# Altium PCB A39C-T400A22D1a.pcbdoc
Units mm, origin at the board's own origin, x right, y up, seen from the top; angles counter-clockwise.
Board outline 74.15 x 49.73 mm, 2 copper layers (Top Layer, Bottom Layer); 2 components, 7 nets, 10 pads, 0 vias.
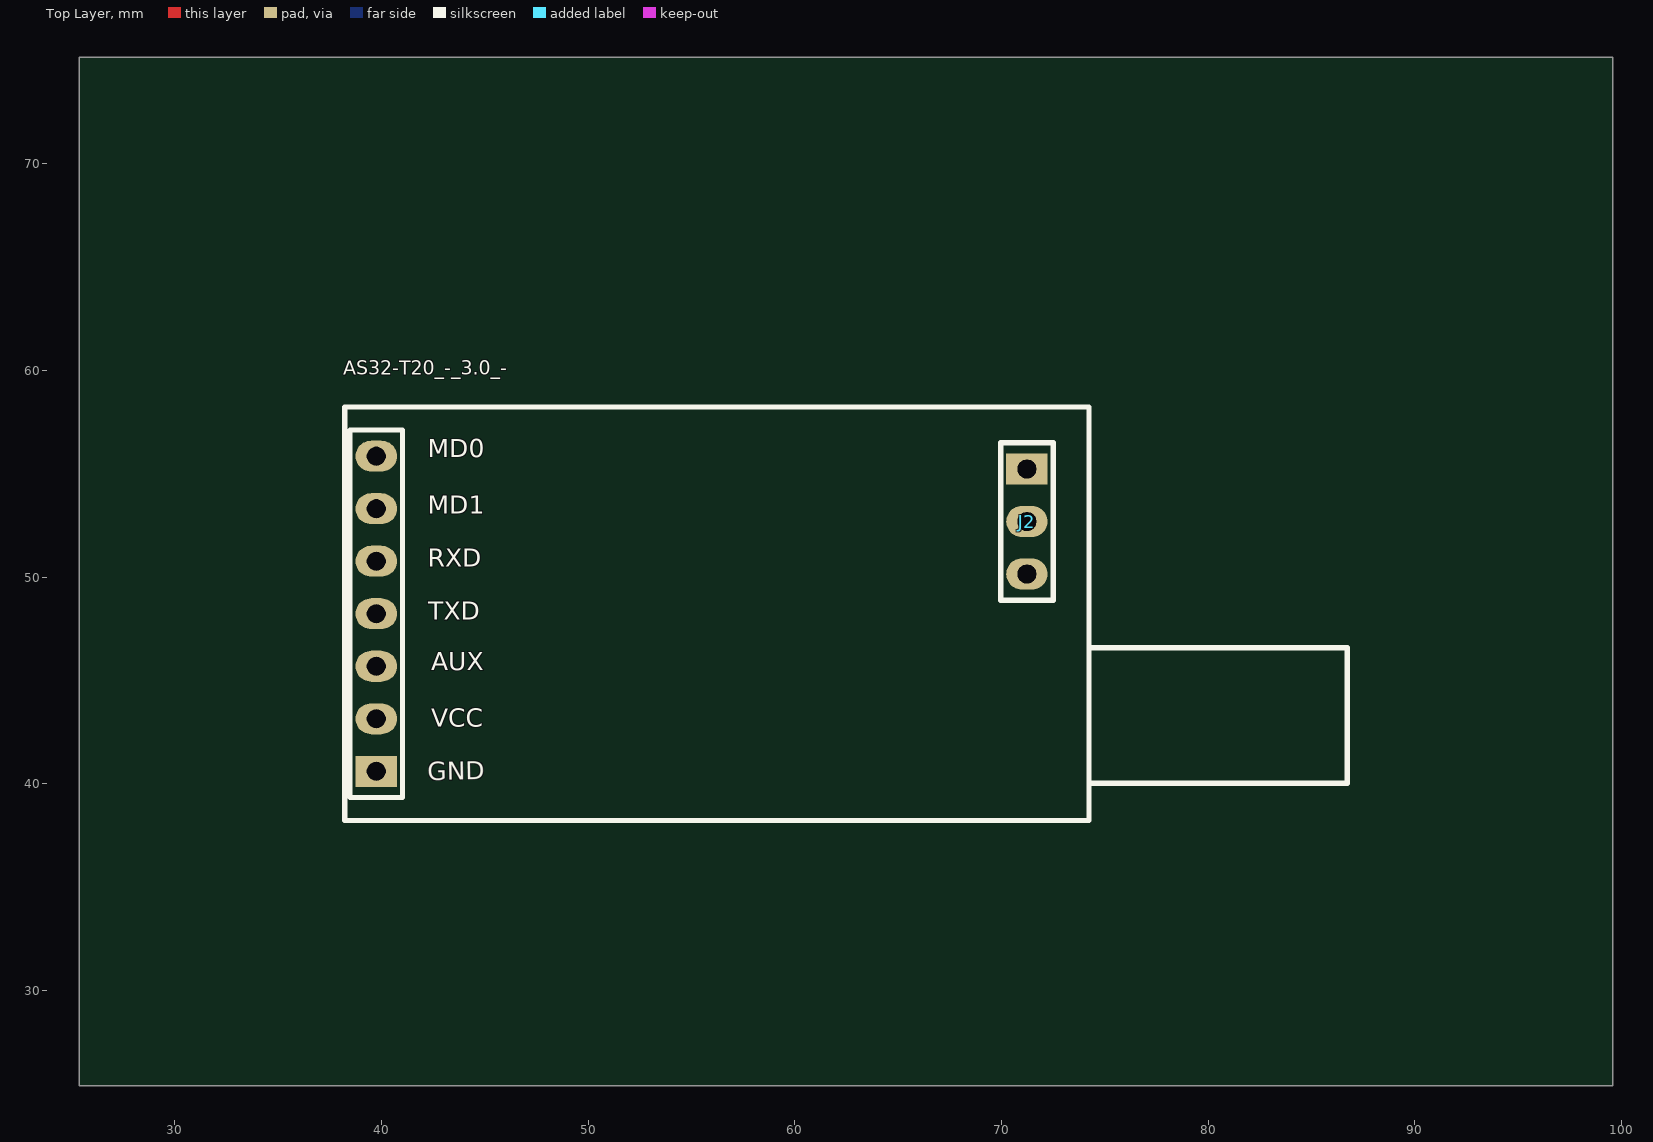
[diagram p0: Top Layer view]
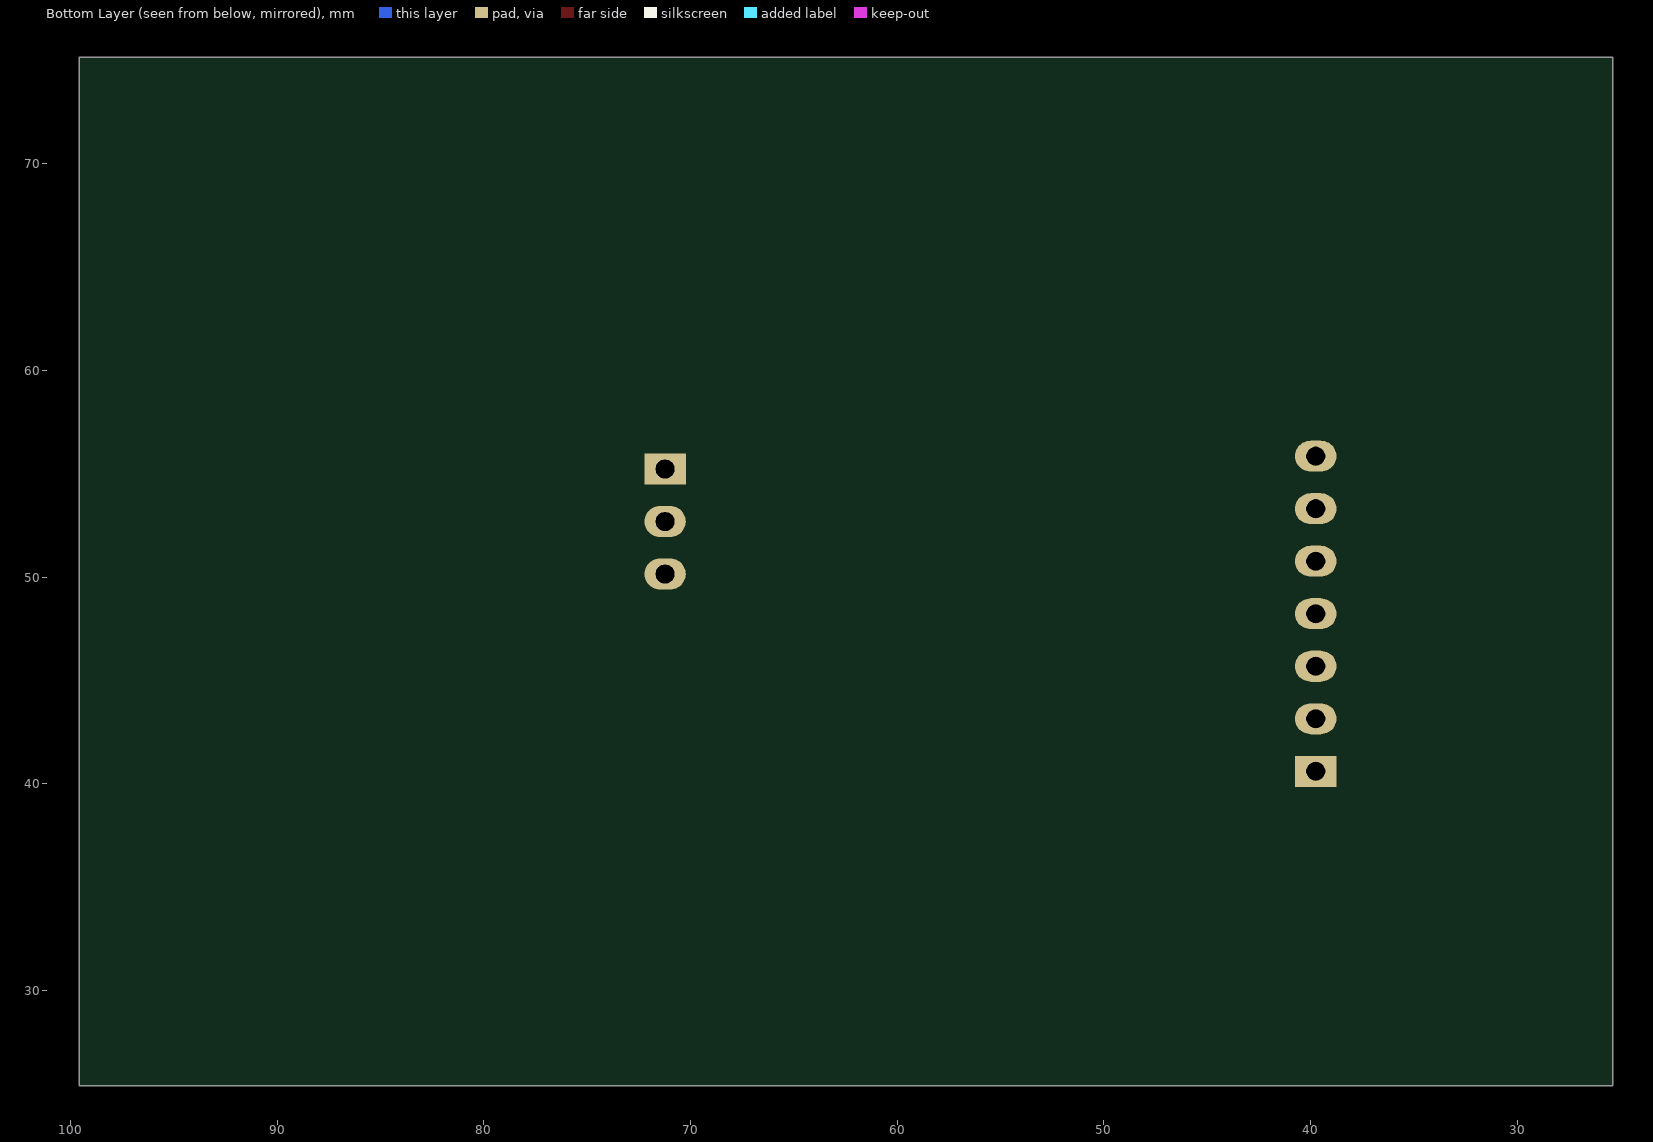
[diagram p1: Bottom Layer view, seen from below]

## Layer stack, top to bottom
Top Layer: signal copper (thickness not stored)
Dielectric: dielectric 0.32, FR-4, Dk 4.8
Bottom Layer: signal copper (thickness not stored)

## Board outline
99.554,25.4 25.4,25.4 25.4,75.133 99.554,75.133

## Components (designator, comment, footprint, x,y, rotation, side; value= is the part's Value field where it differs from the comment)
AS32-T20_-_3.0_- "HEADER1X7-2.54MM" HEADER1X7-2.54MM 39.755,40.607 r0 top
J2 "HEADER1X3-2.54MM" HEADER1X3-2.54MM 71.227,55.227 r180 top

## Footprints (in the part's own frame and the unit in brackets; to place one, negate y for a bottom-side part, rotate by r counter-clockwise, add the part's x,y. Pads: shape width x height; smd on the part's side, far side on the other; paste and mask are expansions set on the pad)
HEADER1X3-2.54MM [mm]
  rect 2x1.5 hole 0.9 slot 0.905 at 0 deg: 1(0,0)
  oval 2x1.5 hole 0.9 slot 0.905 at 0 deg: 2(0,2.54) 3(0,5.08)
  silkscreen extent -1.27,-1.27 1.27,6.35
HEADER1X7-2.54MM [mm]
  rect 2x1.5 hole 0.9 slot 0.905 at 0 deg: 1(0,0)
  oval 2x1.5 hole 0.9 slot 0.905 at 0 deg: 2(0,2.54) 3(0,5.08) 4(0,7.62) 5(0,10.16) 6(0,12.7) 7(0,15.24)
  silkscreen extent -1.27,-1.27 1.27,16.51

## Nets (pads, with @x,y where several pads share a name; then routed paths per layer and width w, separated by ;. In a path a pad name is that pad's centre, name@x,y a point inside that pad or via, vN(x,y) a via of type N, cw(c..) or ccw(c..) an arc to the next point about the centre after c; other vN are vias at no path point)
S$7: 
S$9: 
S$11: 
S$13: 
S$15: 
S$17: 
S$19: 
pads on no net: AS32-T20_-_3.0_-.1 AS32-T20_-_3.0_-.2 AS32-T20_-_3.0_-.3 AS32-T20_-_3.0_-.4 AS32-T20_-_3.0_-.5 AS32-T20_-_3.0_-.6 AS32-T20_-_3.0_-.7 J2.1 J2.2 J2.3

## Silkscreen, mask and mechanical layers (free items; w line width, h text height)
Top Overlay:
  lines w0.254 net S$11: 74.227,38.227 74.227,58.227
  lines w0.254 net S$13: 38.227,38.227 74.227,38.227
  lines w0.254 net S$15: 74.226,40.028 78.524,40.028 86.726,40.028
  lines w0.254 net S$17: 86.727,40.027 86.727,46.577
  lines w0.254 net S$19: 74.227,46.577 86.727,46.577
  lines w0.254 net S$7: 38.227,38.227 38.227,58.227
  lines w0.254 net S$9: 38.227,58.227 74.227,58.227
  text "MD0" at 42.248,55.499 h1.5
  text "MD1" at 42.248,52.78 h1.5
  text "RXD" at 42.24,50.221 h1.5
  text "TXD" at 42.273,47.649 h1.5
  text "AUX" at 42.418,45.209 h1.5
  text "VCC" at 42.41,42.48 h1.5
  text "GND" at 42.235,39.878 h1.5 r1
Document:
  lines w0.003: 62.452,50.241 62.502,50.292